# Altium PCB PCB1.PcbDoc
Units mil, origin at the board's own origin, x right, y up, seen from the top; angles counter-clockwise.
Board outline 2470 x 1585 mil, 2 copper layers (Top Layer, Bottom Layer); 14 components, 7 nets, 35 pads, 1 vias.
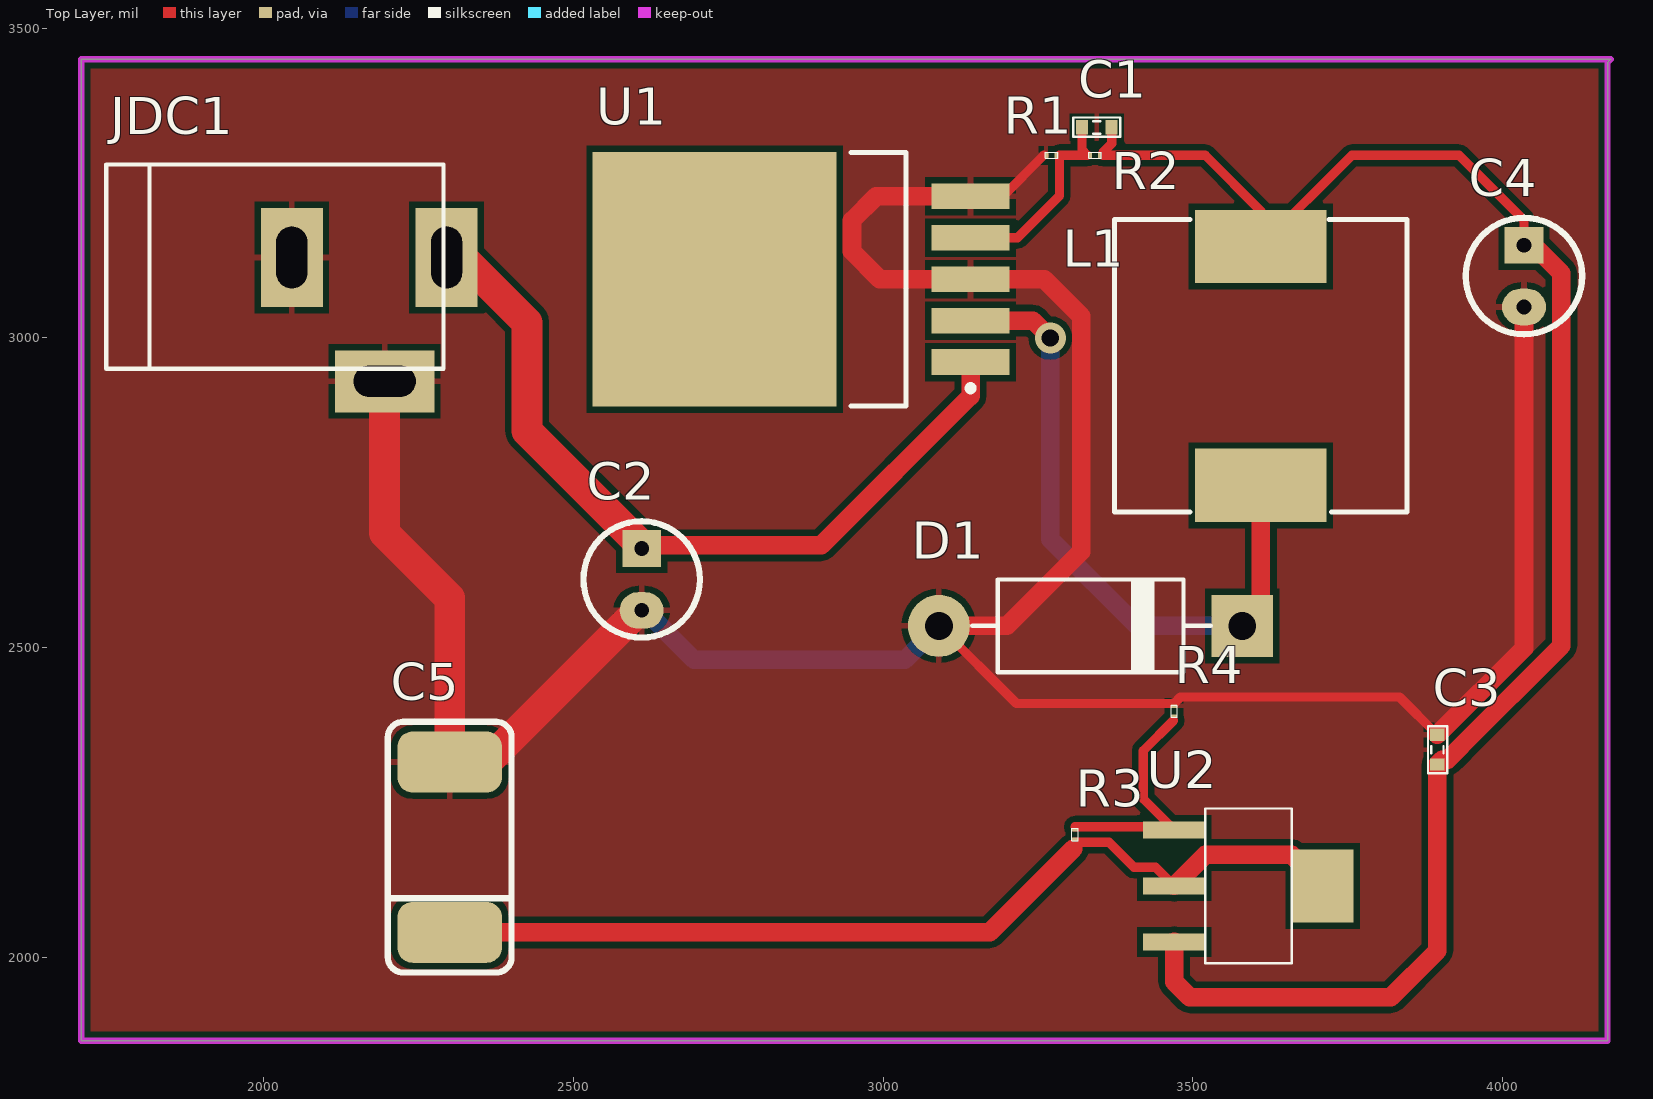
[diagram p0: Top Layer view]
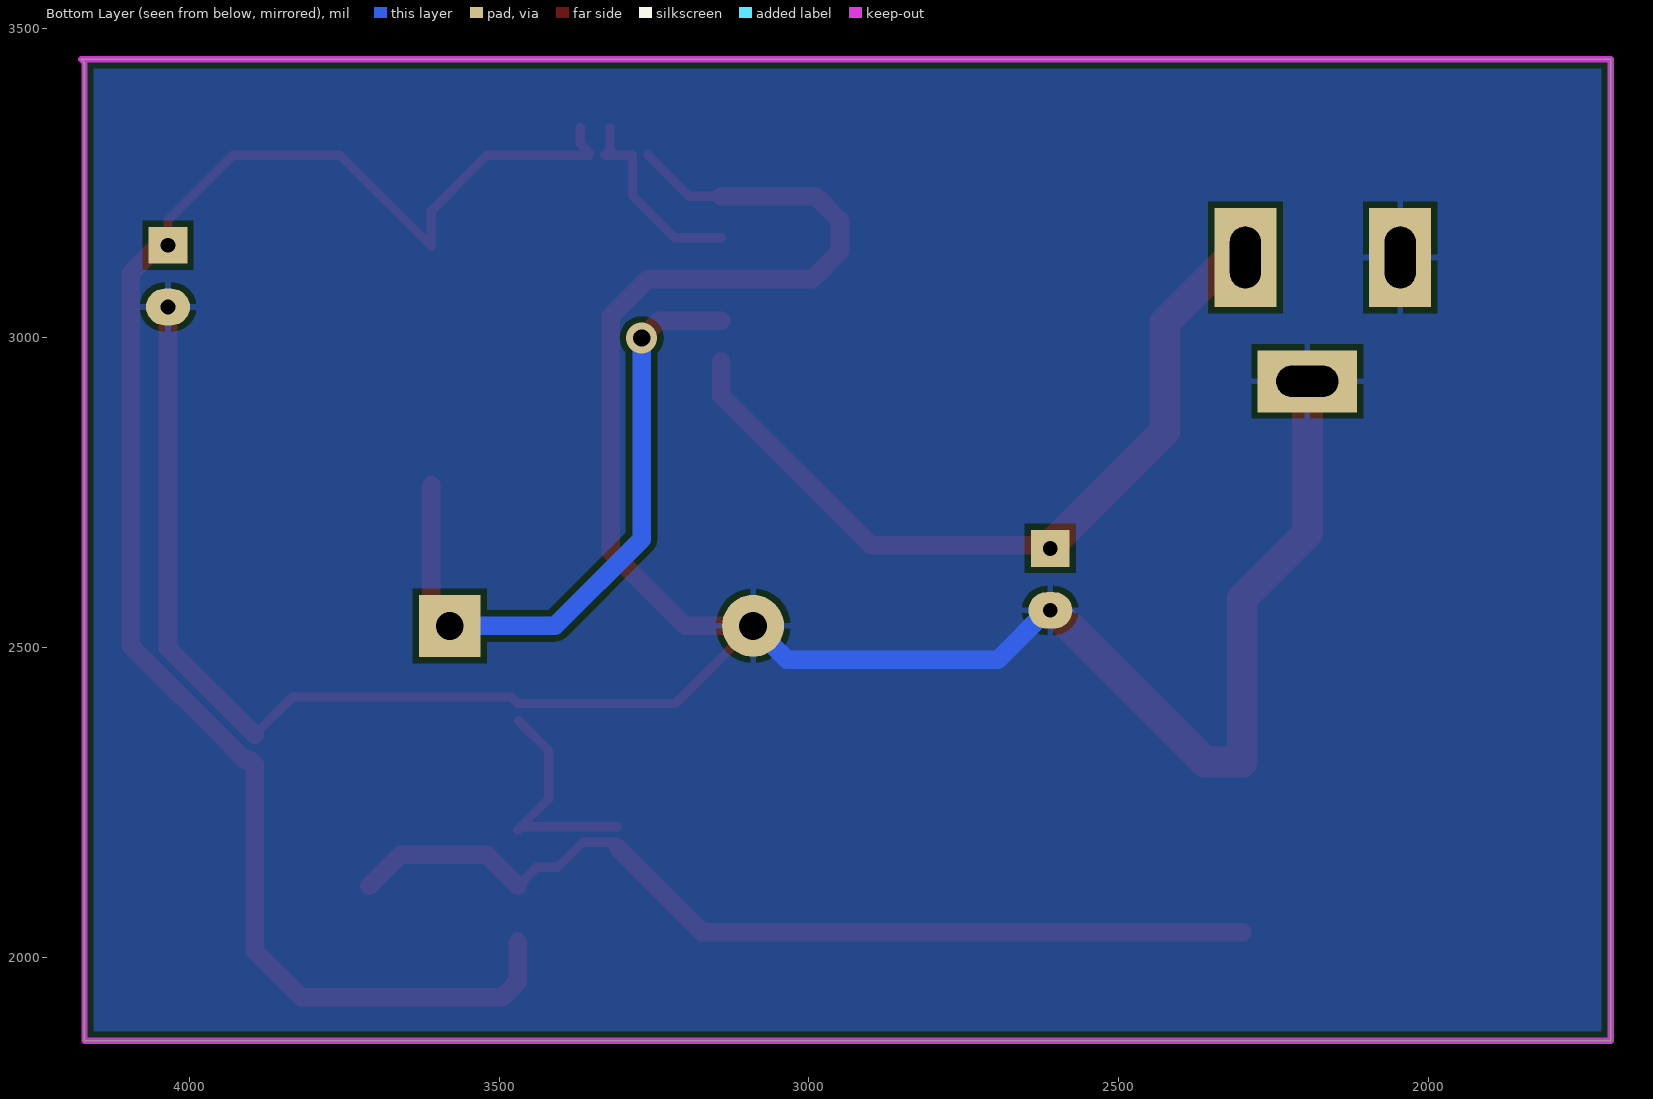
[diagram p1: Bottom Layer view, seen from below]
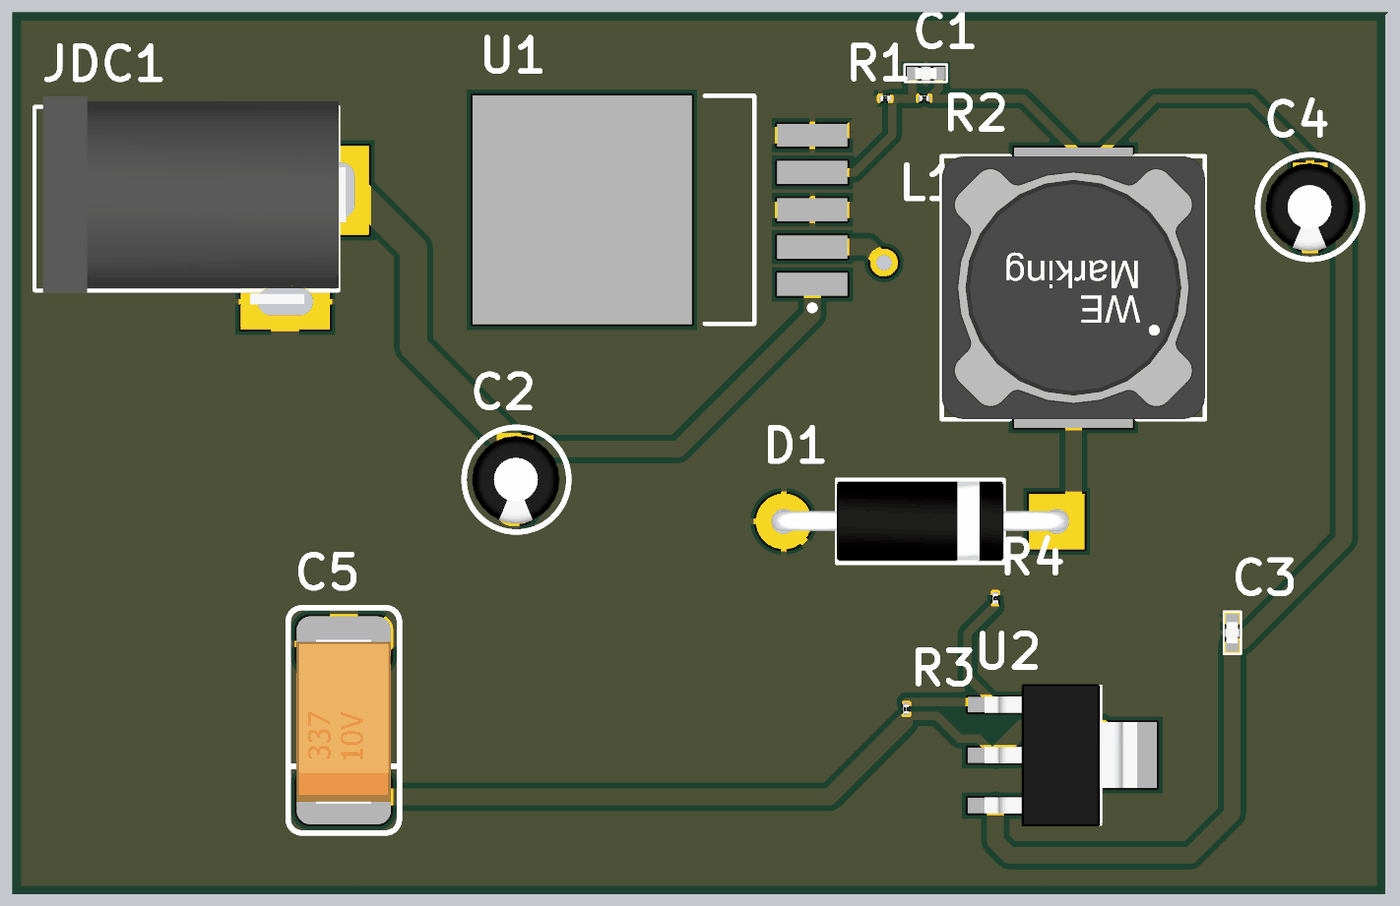
[diagram p2: 3D render of the assembled board from above, using the file's embedded part models]

## Layer stack, top to bottom
Top Solder: solder mask 0.4, Solder Resist, Dk 3.5
Top Layer: signal copper 1.4
Dielectric 1: dielectric 12.6, FR-4, Dk 4.8
Bottom Layer: signal copper 1.4
Bottom Solder: solder mask 0.4, Solder Resist, Dk 3.5

## Board outline
1705,1865 1705,3450 4175,3450 4170,3445 4170,1865

## Design rules (kind name [scope] priority, off if disabled: settings)
Clearance [All] p1: gap=10 ignorepadtopadclearanceinfootprint=TRUE
PolygonConnect [All] p1: connectstyle=Relief reliefconductorwidth=10 reliefentries=4 polygonreliefangle="90 Angle" airgapwidth=10
RoutingVias [All] p1: holewidth=28 width=50 viastyle="Through Hole" minholewidth=28 minwidth=50 maxholewidth=28 maxwidth=50
SolderMaskExpansion [All] p1: expansion=4
Width [All] p1: maxlimit=50 minlimit=15 preferedwidth=30
30 further rules are at their usual default settings.

## Classes and differential pairs
component class "LM2596 AMS1117": C2 C3 C4 C5 D1 JDC1 L1 R1 R2 R3 R4 U1 U2

## Components (designator, comment, footprint, x,y, rotation, side; value= is the part's Value field where it differs from the comment)
C1 "104" CAP_0402 3345,3340 r0 top value=33p
C2 "10uC" CA-ALU-2.54 2610,2610 r270 top value=104
C3 "10uC" CAP_0402 3895,2335 r270 top value=33p
C4 "10uC" CA-ALU-2.54 4035,3100 r270 top value=104
C5 "10uC" CAP_7343 2300,2175 r90 top
D1 "Diode" DIO-3A 3605,2535 r180 top
JDC1 "Jac DC" DC-IN 2170,3030 r0 top
L1 "150mH" L-SMD-M-12x10 3610,2955 r180 top value="150 mH"
R1 "Resistor" RES-SMD-0101 3272.12,3295.01 r180 top
R2 "Resistor" RES-SMD-0101 3342.12,3295.01 r180 top
R3 "11R" RES-SMD-0101 3310.01,2197.88 r90 top
R4 "18R" RES-SMD-0101 3470.01,2397.13 r90 top
U1 "LM2976" TO-263 2905,3095 r180 top
U2 "LM1117-ADJ" LM1117-SOP 3520,2115 r270 top

## Footprints (in the part's own frame and the unit in brackets; to place one, negate y for a bottom-side part, rotate by r counter-clockwise, add the part's x,y. Pads: shape width x height; smd on the part's side, far side on the other; paste and mask are expansions set on the pad)
CA-ALU-2.54 [mm]
  rect 1.5x1.58 hole 0.6: 1(-1.27,0)
  oval 1.5x1.8 hole 0.6: 2(1.27,0)
  silkscreen extent -2.39,-2.39 2.39,2.39, body extent -2,-2.03 1.99,1.97, height 7.01
CAP_0402 [mm]
  rect 0.5x0.6 smd: 1(-0.61,0) 2(0.61,0)
  silkscreen extent -0.97,-0.38 0.97,0.41, body extent -0.5,-0.27 0.5,0.26, height 0.35
CAP_7343 [mm] "Capacitor Tantalum 7343"
  rrect50% 2.5x4.3 smd: 1(-3.429,0) 2(3.556,0)
  silkscreen extent -5.08,-2.54 5.21,2.54, body extent -3.75,-2.14 3.75,2.16, height 2.8
DC-IN [mil] "Jac DC input"
  rect 100x160 hole 50 slot 100 at 90 deg: 1(125,100) 2(-125,100)
  rect 160x100 hole 50 slot 100 at 0 deg: 3(25,-100)
  silkscreen extent -425,-80 120,250, body extent -410,-105 134,269, height 434
DIO-3A [mil] "Diode 3A"
  round 100 hole 45: 1(515,0)
  rect 100x100 hole 45: 2(25,0)
  silkscreen extent 76,-75 461,75, body extent 4,-72 536,70, height 142
L-SMD-M-12x10 [mm] "WE-PDA SMD Shielded Power Inductor, 1210"
  rect 5.4x3 smd: 1(0,4.9) 2(0,-4.9)
  silkscreen extent -6,-6 6,6, body extent -6,-6 6,6, height 9.7
LM1117-SOP [mm]
  rect 0.7x2.54 smd: 1(-2.3,-1.27) 2(0,-1.27) 3(2.3,-1.27)
  rect 3x2.54 smd: 2(0,4.826)
  silkscreen extent -3.18,0 3.17,3.56, body extent -3.25,-1.78 3.25,5.18, height 1.68
RES-SMD-0101 [mm]
  rect 0.15x0.25 smd: 1(-0.2,0) 2(0.2,0)
  silkscreen extent -0.25,-0.13 0.25,0.13, body extent -0.2,-0.1 0.2,0.1, height 0.12
TO-263 [mm]
  rect 3.2x1.05 smd: 1(-6,3.4) 2(-6,1.7) 3(-6,0) 4(-6,-1.7) 5(-6,-3.4)
  rect 10x10.45 smd: 6(4.5,0)
  silkscreen extent -6.13,-5.2 -1.1,5.2, body extent -6.58,-5.2 7.57,5.2, height 4.65

## Part data
C1 C3: library part CapSMD, "Capacitor", LatestRevisionDate=17-Jul-2002, LatestRevisionNote="Re-released for DXP Platform.", PackageReference=RAD-0.3, Published=8-Jun-2000, Publisher="Altium Limited"
C2 C4: library part CAP-ALU-DIP, "Capacitor (Semiconductor SIM Model)", LatestRevisionDate=17-Jul-2002, LatestRevisionNote="Re-released for DXP Platform.", PackageReference=C1206, Publisher="Altium Limited"
C5: library part CAP_TAN_SMD, "Polazied Tantalum Capacitor"
D1: library part "Diode Schottky", "Generic Diode Schottky"
JDC1: library part DCIN, "Jac DC input"
L1: library part Inductor, "Inductor"
R1 R2 R3 R4: library part "Resistor - SMD", "Resistor SMD", Manufacturer="Generic Components", Class=Passive, Published=08/06/2000, Publisher="Altium Hobart Technology Centre"
U1: library part LM2596, Max Input Voltage="12 V", Max Output Current="3 (6.0 peak) A", Max Output Voltage=mV, Temperature Range="-40 to +125 degC", Category=IC-Power, Min Input Voltage=mV, Min Output Voltage=mV, Mounting Technology="Surface Mount", Status=Unreleased, Supply Voltage=mV
U2: "800mA Low-Dropout Linear Regulator", Creator="Nguyen Ba Bien", Website=http://group3i.net

## Via types
v1: diameter 50, hole 28, Top Layer to Bottom Layer, 1 vias

## Nets (pads, with @x,y where several pads share a name; then routed paths per layer and width w, separated by ;. In a path a pad name is that pad's centre, name@x,y a point inside that pad or via, vN(x,y) a via of type N, cw(c..) or ccw(c..) an arc to the next point about the centre after c; other vN are vias at no path point)
+3.3: C5.1 R3.1 U2.2 | length 1533.7
  Top Layer w15: 3310,2185.3 3364.7,2185.3 3405,2145 3440,2145 U2.2@3470,2115
  Top Layer w30: C5.1 3172.2,2040 3307.2,2175 ; U2.2@3470,2115 3520,2165 3660,2165 U2.2@3710,2115
+5: C1.2 C3.2 C4.1 L1.2 R2.1 U2.3 | length 2762.6
  Top Layer w15: C1.2 3369,3314 3355,3300 3355,3295 3520,3295 3610,3205 L1.2 3757.09,3295 3930,3295 4035,3190 C4.1
  Top Layer w30: U2.3 3470,1960 3495,1935 3820,1935 3895,2010 C3.2 3903,2319 3911.57,2319 3916.73,2324.16 3917.17,2324.16 3931.81,2338.8 3931.81,2339.24 4095.43,2502.86 4095.43,3104.57 4050,3150 C4.1
+12: C2.1 JDC1.1 U1.1 | length 1296.2
  Top Layer w30: C2.1@2610,2665 2900,2665 3141.22,2906.22 U1.1
  Top Layer w50: JDC1.1 2320,3130 2425,3025 2425,2850 C2.1@2610,2665
GND: C2.2 C3.1 C4.2 C5.2 D1.1 JDC1.2 JDC1.3 R1.2 R4.2 U1.3 U1.5 | length 4722.1
  Top Layer w15: D1.1 3215.3,2409.7 3470,2409.7 3480.3,2420 3834,2420 C3.1 ; U1.5 3193.41,3228.86 3259.55,3295
  Top Layer w30: D1.1 3200,2535 3320,2655 3320,3035 3260,3095 U1.3 2994.68,3095 2949.68,3140 2949.68,3189.68 2988.86,3228.86 U1.5 ; C3.1 4035,2499 C4.2
  Top Layer w50: JDC1.3 2195,2685 2300,2580 C5.2 2360,2315 C2.2@2610,2565
  Bottom Layer w30: C2.2@2610,2565 2695,2480 3035,2480 D1.1
NetC1_1: C1.1 R1.1 R2.2 U1.4 | length 330.2
  Top Layer w15: U1.4 3216.93,3161.93 3284.7,3229.7 3284.7,3295 3329.55,3295 3321,3303.55 C1.1
NetD1_2: D1.2 L1.1 U1.2 | length 1072.9
  Top Layer w30: U1.2 3241.93,3028.07 v1(3270,3000) ; D1.2 3610,2565 L1.1
  Bottom Layer w30: v1(3270,3000) 3270,2675 3410,2535 D1.2
NetR3_2: R3.2 R4.1 U2.1 | length 372.7
  Top Layer w15: 3310,2210.45 U2.1@3465.1,2210.45 ; 3468.83,2382.2 3420,2333.38 3420,2255.55 U2.1@3465.1,2210.45 ; U2.1 U2.1@3465.1,2210.45
pads on no net: U1.6

## Polygon pours and split planes (outlines as drawn)
GND on Top Layer "Top Layer-GND" (solid, remove dead copper, pour order 0): 1705,3450 1705,1865 4170,1865 4170,3440 1715,3440 1705,3450
GND on Bottom Layer "Bottom Layer-GND" (solid, remove dead copper, pour order 2): 1705,3450 1705,1865 4170,1865 4170,3445 1710,3445 1705,3450

## Keep-outs
Keep-Out Layer:
  lines w10: 1705,1865 1705,3450 4175,3450 4170,3445 4170,1910 4170,1865 1705,1865